# EAGLE board circuit_board (EAGLE 8.7.1)
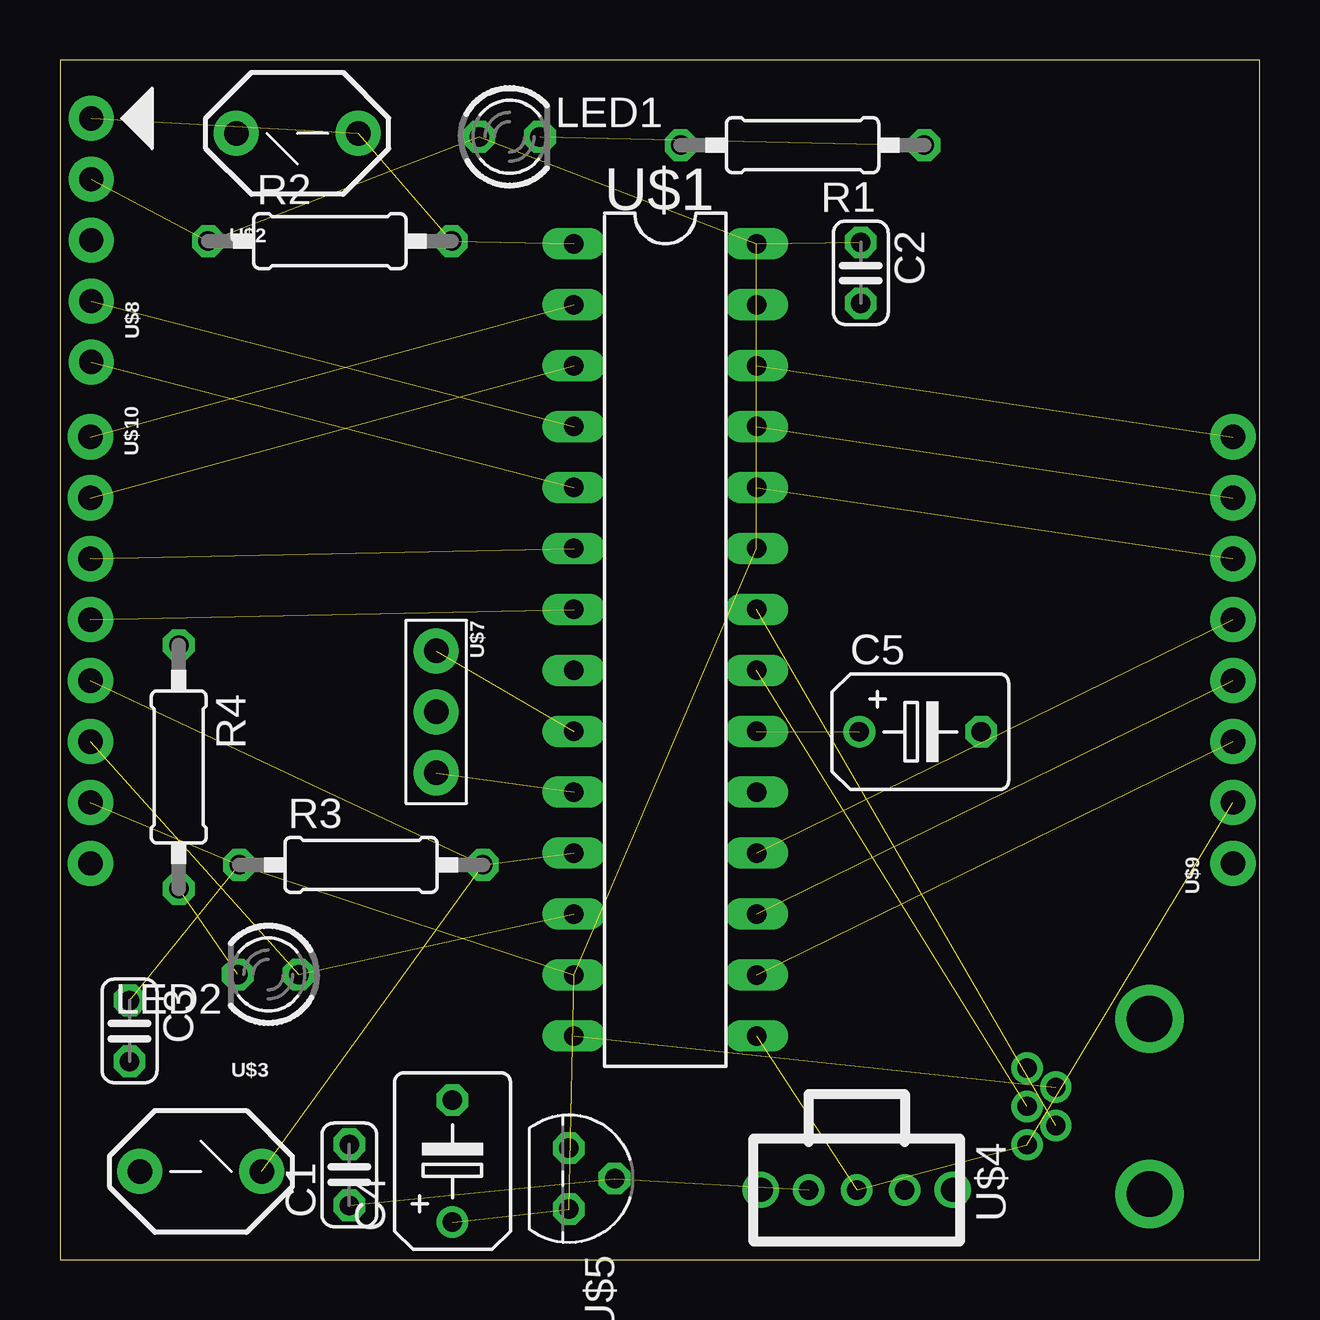
[diagram p0: board, top side]
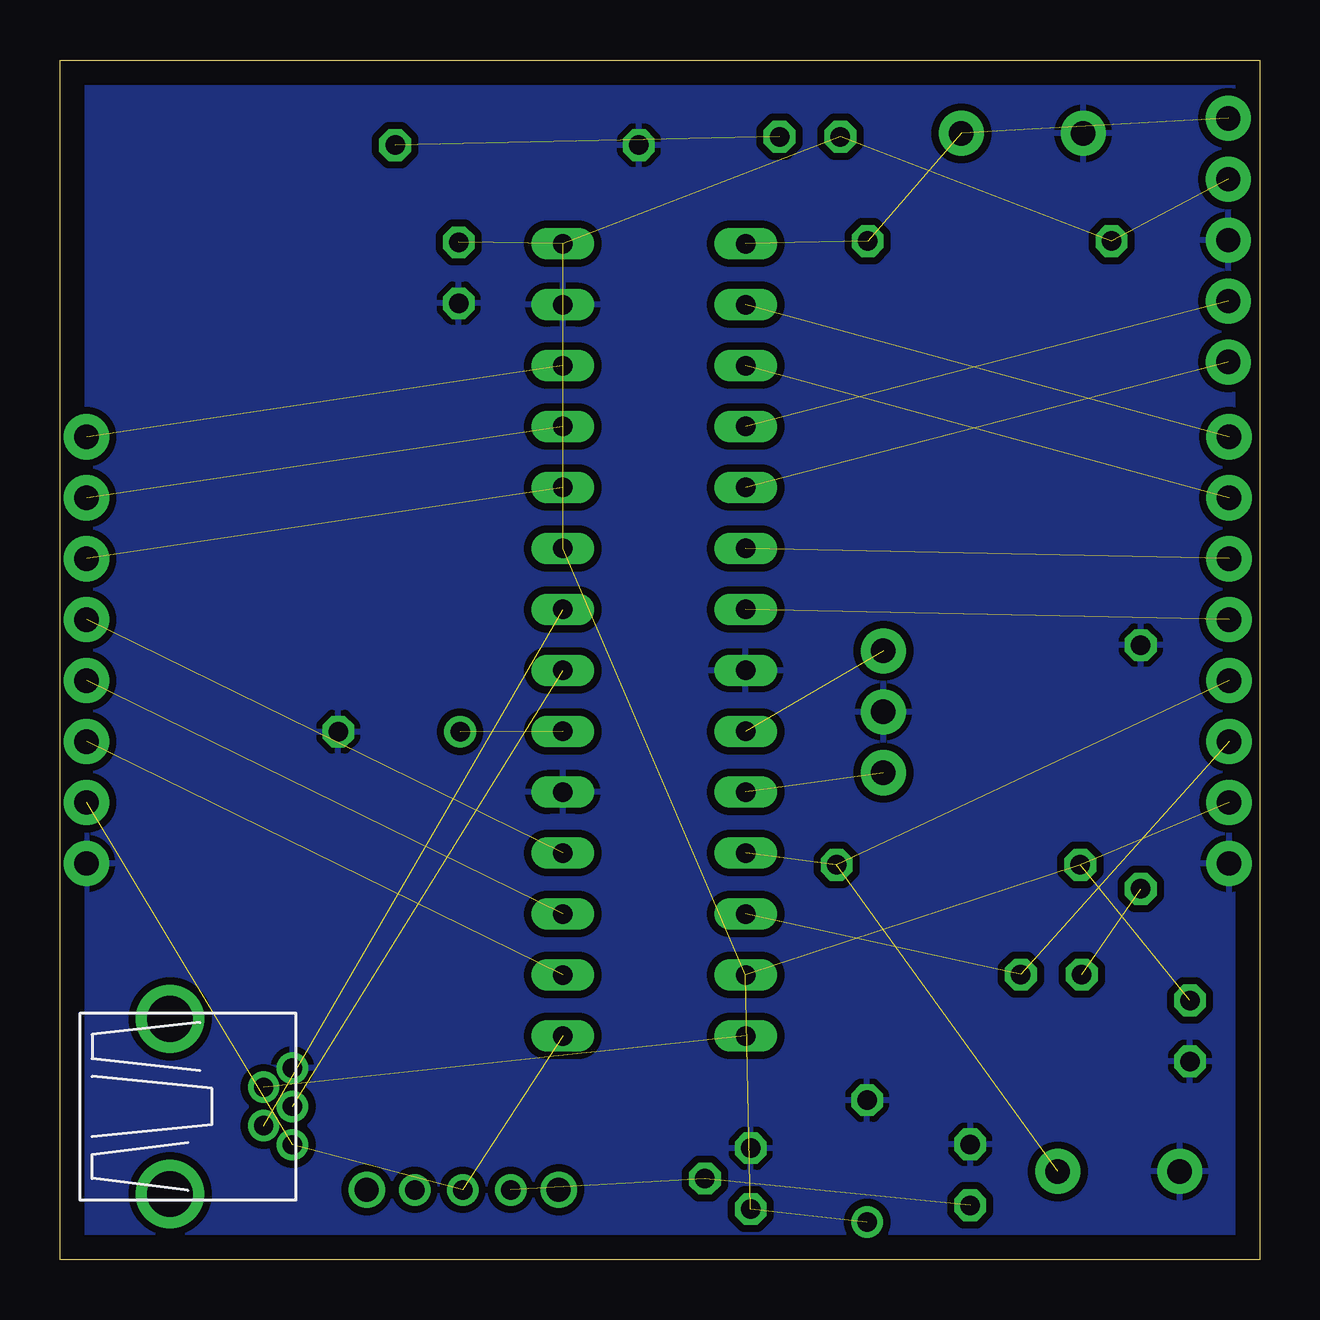
[diagram p1: board, bottom side, seen from below]

Size 50 x 50 mm. Coordinates in mm from the lower left corner, seen from the top.
Outline: 0,0 50,0 50,50 0,50 0,0
Copper layers (1*16): Top 0.035mm / dielectric 1.5mm / Bottom 0.035mm
Design rules "default": minimum track width 6mil, minimum drill 0.35mm, track to track 6mil, track to pad 6mil, pad to pad 6mil, via to via 6mil, smd to smd 6mil, copper to edge 40mil, drill to drill 6mil, minimum pad ring 10mil, minimum via ring 8mil, stop-mask expansion 4mil, vias tented up to drill 0mil, thermal gap 10mil

## Footprints (pad centres in the part's own frame; a part is rotated, then mirrored left to right if it is on the bottom)
C025-024X044 = drill 0.813 octagon: 1 -1.27,0; 2 1.27,0
B45181B = drill 0.813: + -2.54,0 | drill 0.813 octagon: - 2.54,0
LED3MM = drill 0.813 octagon: A -1.27,0; K 1.27,0
0207/10 = drill 0.813 octagon: 1 -5.08,0; 2 5.08,0
DIL28-3 = drill 0.813 long: 1 -16.51,-3.81; 2 -13.97,-3.81; 3 -11.43,-3.81; 4 -8.89,-3.81; 5 -6.35,-3.81; 6 -3.81,-3.81; 7 -1.27,-3.81; 8 1.27,-3.81; 9 3.81,-3.81; 10 6.35,-3.81; 11 8.89,-3.81; 12 11.43,-3.81; 13 13.97,-3.81; 14 16.51,-3.81; 15 16.51,3.81; 16 13.97,3.81; 17 11.43,3.81; 18 8.89,3.81; 19 6.35,3.81; 20 3.81,3.81; 21 1.27,3.81; 22 -1.27,3.81; 23 -3.81,3.81; 24 -6.35,3.81; 25 -8.89,3.81; 26 -11.43,3.81; 27 -13.97,3.81; 28 -16.51,3.81
1X03 = drill 1.016 pad 1.88: 1 0,0; 2 5.08,0
USB-MB-H = drill 0.8: D+ 5.1,0; D- 3.9,0.8; GND 5.1,-1.6; ID 3.9,-0.8; VBUS 5.1,1.6 | drill 1.9: P$6 0,-3.65; P$7 0,3.65
TO92 = drill 0.813 octagon: 1 -1.27,0; 2 0,1.905; 3 1.27,0
SLIDE_SW = drill 0.8: 1 -2,0; 2 0,0; 3 2,0 | drill 1: P$1 -4,0; P$2 4,0
1X03' = drill 1.016 pad 1.88: 1 0,0; 2 2.54,0; 3 5.08,0
1X05 = drill 1.016 pad 1.88: 1 0,0; 2 2.54,0; 3 5.08,0; 4 7.62,0; 5 10.16,0
1X08 = drill 1.016 pad 1.88: 1 0,0; 2 2.54,0; 3 5.08,0; 4 7.62,0; 5 10.16,0; 6 12.7,0; 7 15.24,0; 8 17.78,0

## Placement (x,y rotation side)
C1  [C025-024X044]  12.06,3.53 90 top
C2  [C025-024X044]  33.38,41.13 270 top
C3  [C025-024X044]  2.9,9.53 270 top
C4  [B45181B]  16.36,4.1 90 top
C5  [B45181B]  35.86,22 0 top
LED1  [LED3MM]  18.74,46.8 0 top
LED2  [LED3MM]  8.68,11.88 180 top
R1  [0207/10]  30.95,46.45 180 top
R2  [0207/10]  11.25,42.45 0 top
R3  [0207/10]  12.55,16.45 0 top
R4  [0207/10]  4.95,20.53 270 top
U$1  PIC32MX  [DIL28-3]  25.23,25.83 270 top
U$2  PUSH_BUTTON_SPST-NO  [1X03]  12.43,46.94 180 top
U$3  PUSH_BUTTON_SPST-NO  [1X03]  3.33,3.67 0 top
U$4  USB_MINI  [USB-MB-H]  45.41,6.38 180 top
U$5  MCP1072  [TO92]  21.21,3.37 270 top
U$6  SLIDE_SWITCH  [SLIDE_SW]  33.21,2.9 0 top
U$7  OSC  [1X03']  15.68,25.37 270 top
U$8  PICKIT  [1X05]  1.3,47.57 270 top
U$9  CONNECTOR_8PIN-HOLES  [1X08]  48.9,16.51 90 top
U$10  CONNECTOR_8PIN-HOLES  [1X08]  1.27,34.29 270 top

## Library data of the parts
C1-C5 R1-R4 = resistor
LED1 LED2 = led
U$1 = pic32
U$2 U$3 = PUSH_BUTTON
U$4 = usb_conn
U$5 = V_REG
U$6 = SLIDE_SWITCH
U$7 = OSC
U$8 = pickit
U$9 U$10 = connectior-8pin-holes

## Nets
+3V3: C2.1 C3.1 C4.+ LED1.A R2.1 R3.1 U$1.13 U$1.23 U$1.28 U$5.3 U$8.2 U$10.7
+5V: U$1.15 U$4.VBUS U$6.2 U$9.2
GND: C1.2 C2.2 C3.2 C4.- C5.- R1.2 R4.1 U$1.8 U$1.19 U$1.27 U$2.2 U$3.1 U$4.GND U$5.1 U$7.2 U$8.3 U$9.1 U$10.8
N$1: LED1.K R1.1
N$2: LED2.K R4.2
N$3: R2.2 U$1.1 U$2.1 U$8.1
N$4: C5.+ U$1.20
N$6: U$1.21 U$4.D+
N$7: U$1.22 U$4.D-
N$8: C1.1 U$5.2 U$6.1
N$9: U$1.9 U$7.1
N$10: U$1.10 U$7.3
N$11: U$1.5 U$8.5
N$12: U$1.4 U$8.4
RA0: U$1.2 U$10.1
RA1: U$1.3 U$10.2
RA4: LED2.A U$1.12 U$10.6
RB2: U$1.6 U$10.3
RB3: U$1.7 U$10.4
RB4: R3.2 U$1.11 U$3.2 U$10.5
RB7: U$1.16 U$9.3
RB8: U$1.17 U$9.4
RB9: U$1.18 U$9.5
RB13: U$1.24 U$9.6
RB14: U$1.25 U$9.7
RB15: U$1.26 U$9.8
USB: U$1.14 U$4.ID

## Tracks (layer width: path | path; a pad name or v marks a point on that pad's centre or on a via)
+3V3  (11 unrouted)
+5V  (3 unrouted)
GND
  pour Bottom (isolate 0.305): 0,50 50,50 50,0 0,0
N$1  (1 unrouted)
N$2  (1 unrouted)
N$3  (3 unrouted)
N$4  (1 unrouted)
N$6  (1 unrouted)
N$7  (1 unrouted)
N$8  (2 unrouted)
N$9  (1 unrouted)
N$10  (1 unrouted)
N$11  (1 unrouted)
N$12  (1 unrouted)
RA0  (1 unrouted)
RA1  (1 unrouted)
RA4  (2 unrouted)
RB2  (1 unrouted)
RB3  (1 unrouted)
RB4  (3 unrouted)
RB7  (1 unrouted)
RB8  (1 unrouted)
RB9  (1 unrouted)
RB13  (1 unrouted)
RB14  (1 unrouted)
RB15  (1 unrouted)
USB  (1 unrouted)